# Altium PCB smartmcu.PcbDoc
Units mm, origin at the board's own origin, x right, y up, seen from the top; angles counter-clockwise.
Board outline 54.07 x 48 mm, 4 copper layers (Top Layer, Ground, Power 3v3, Bottom Layer), stack 0.603 mm thick; 89 components, 43 nets, 257 pads, 85 vias.
Unrouted connection lines stored in the file: 1.
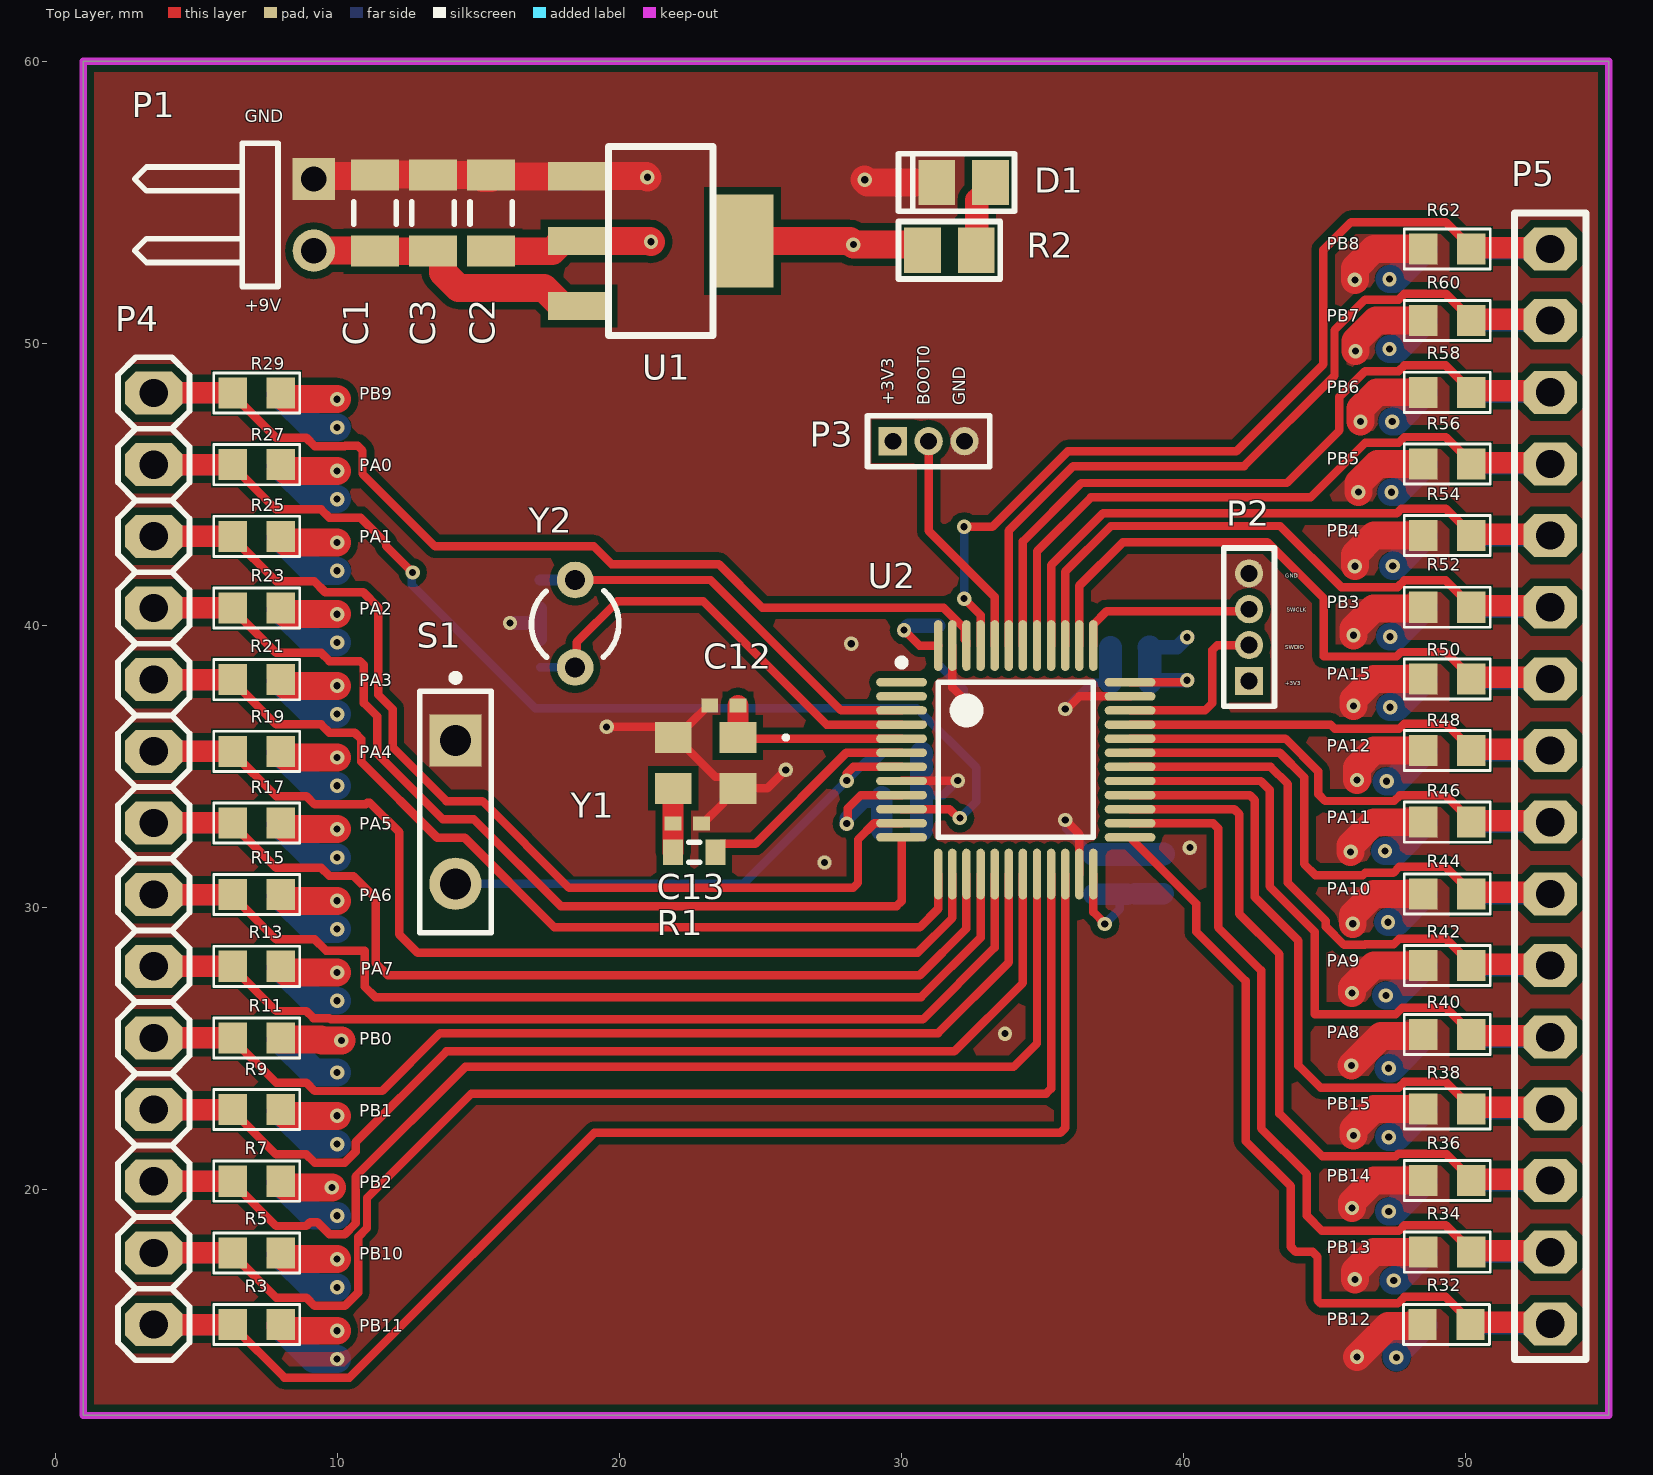
[diagram p0: Top Layer view]
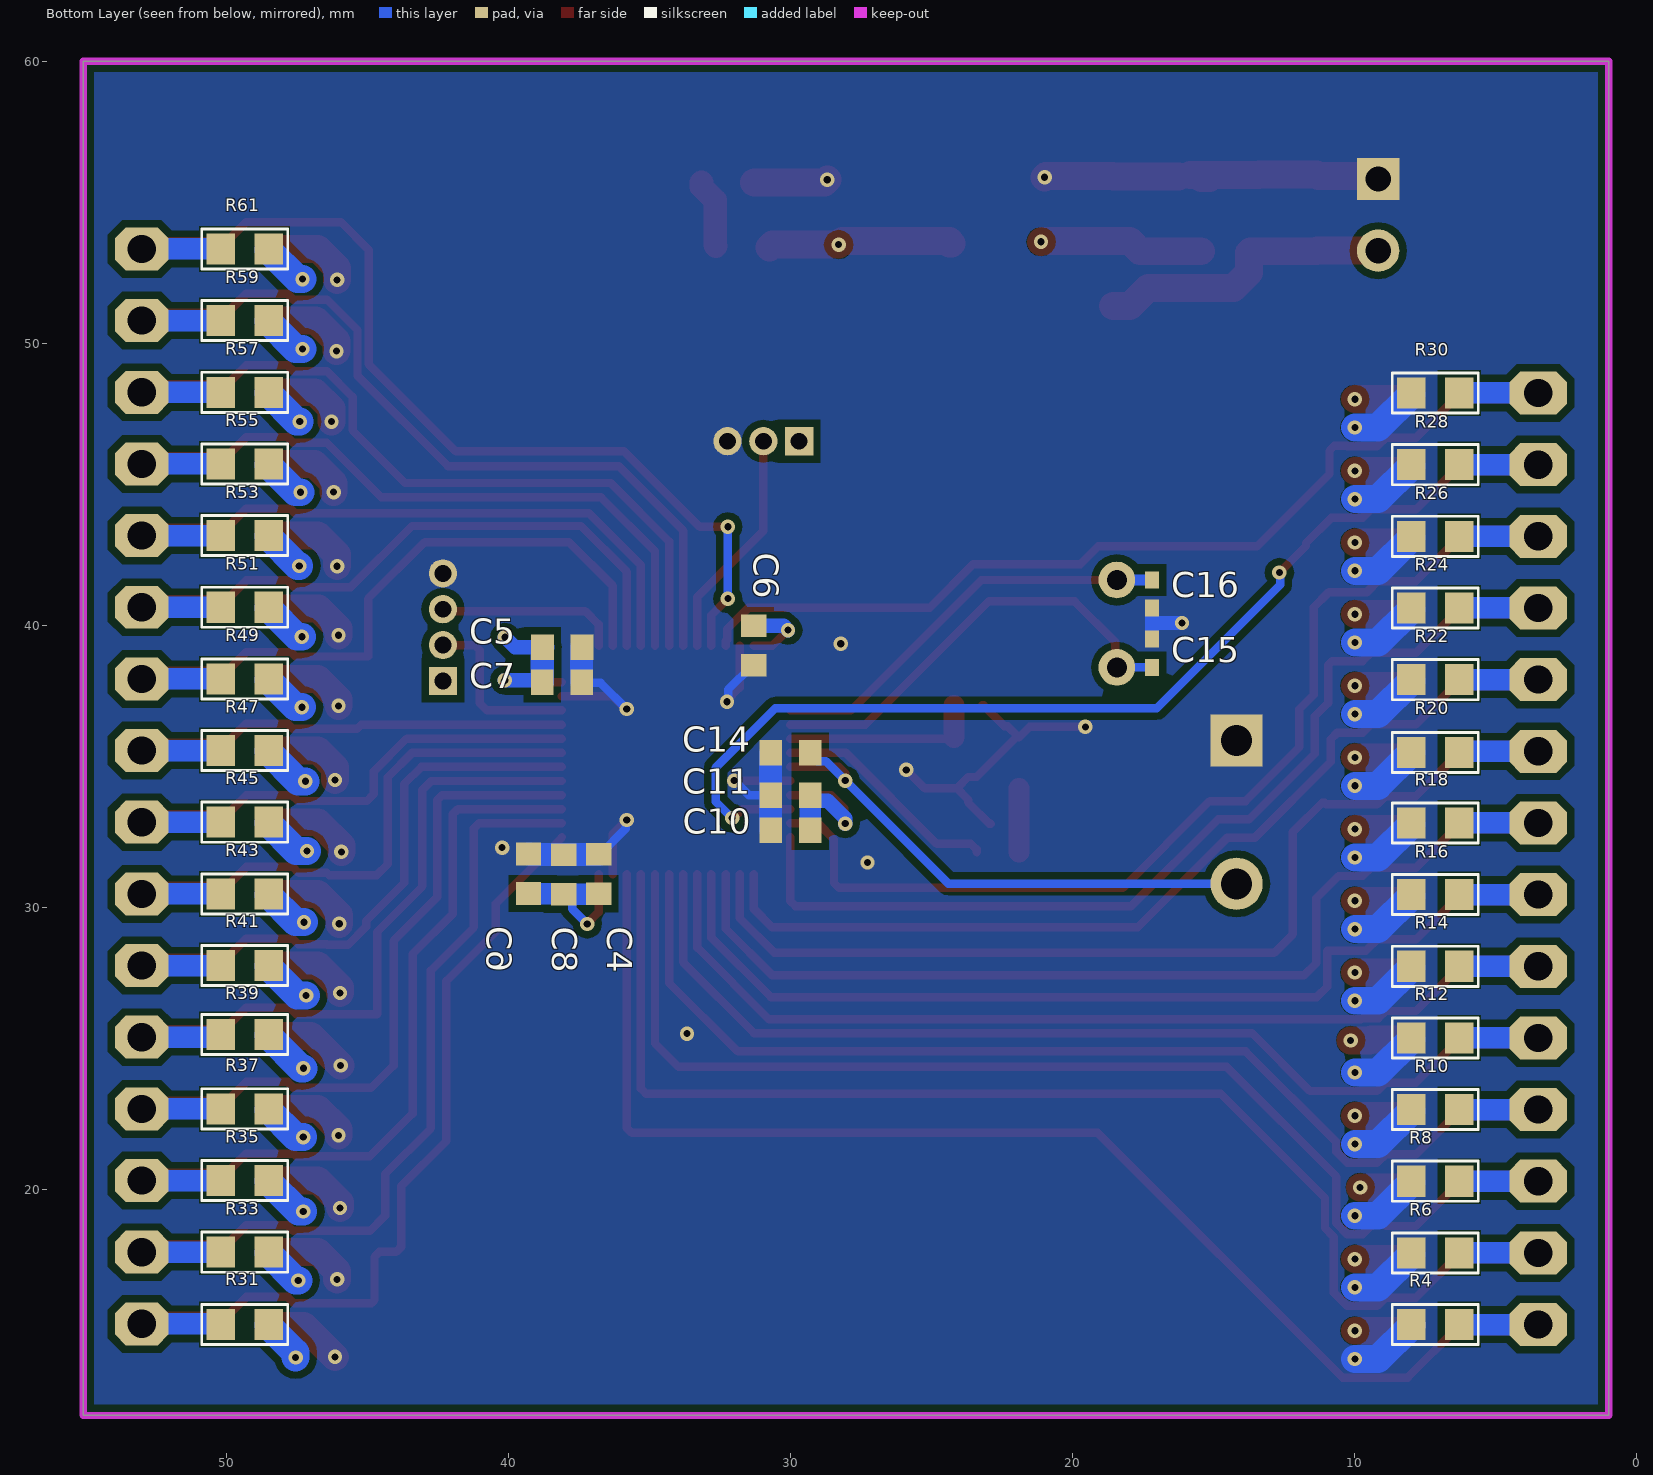
[diagram p1: Bottom Layer view, seen from below]
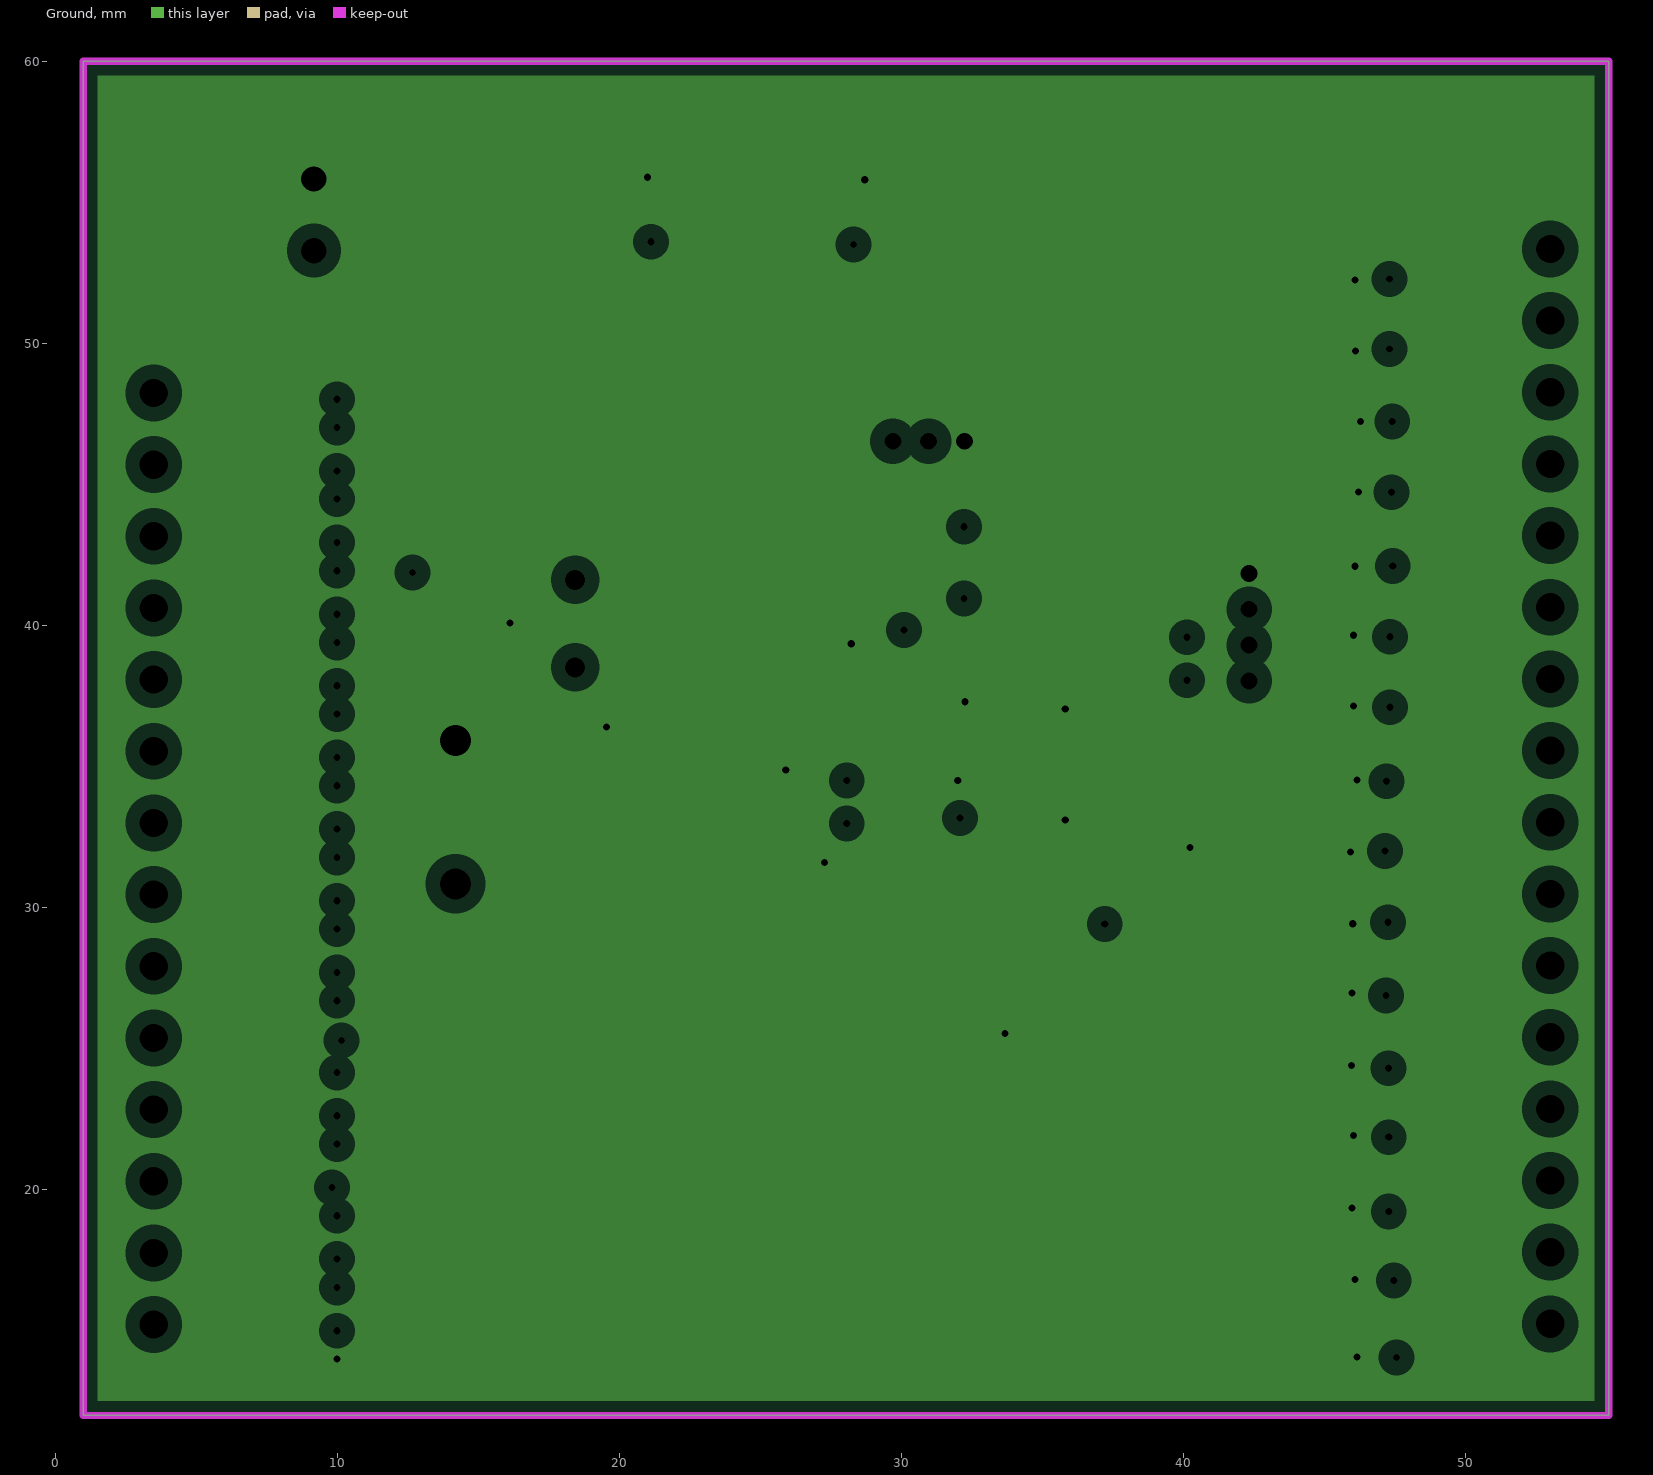
[diagram p2: Ground, clearances drawn from the general rule]
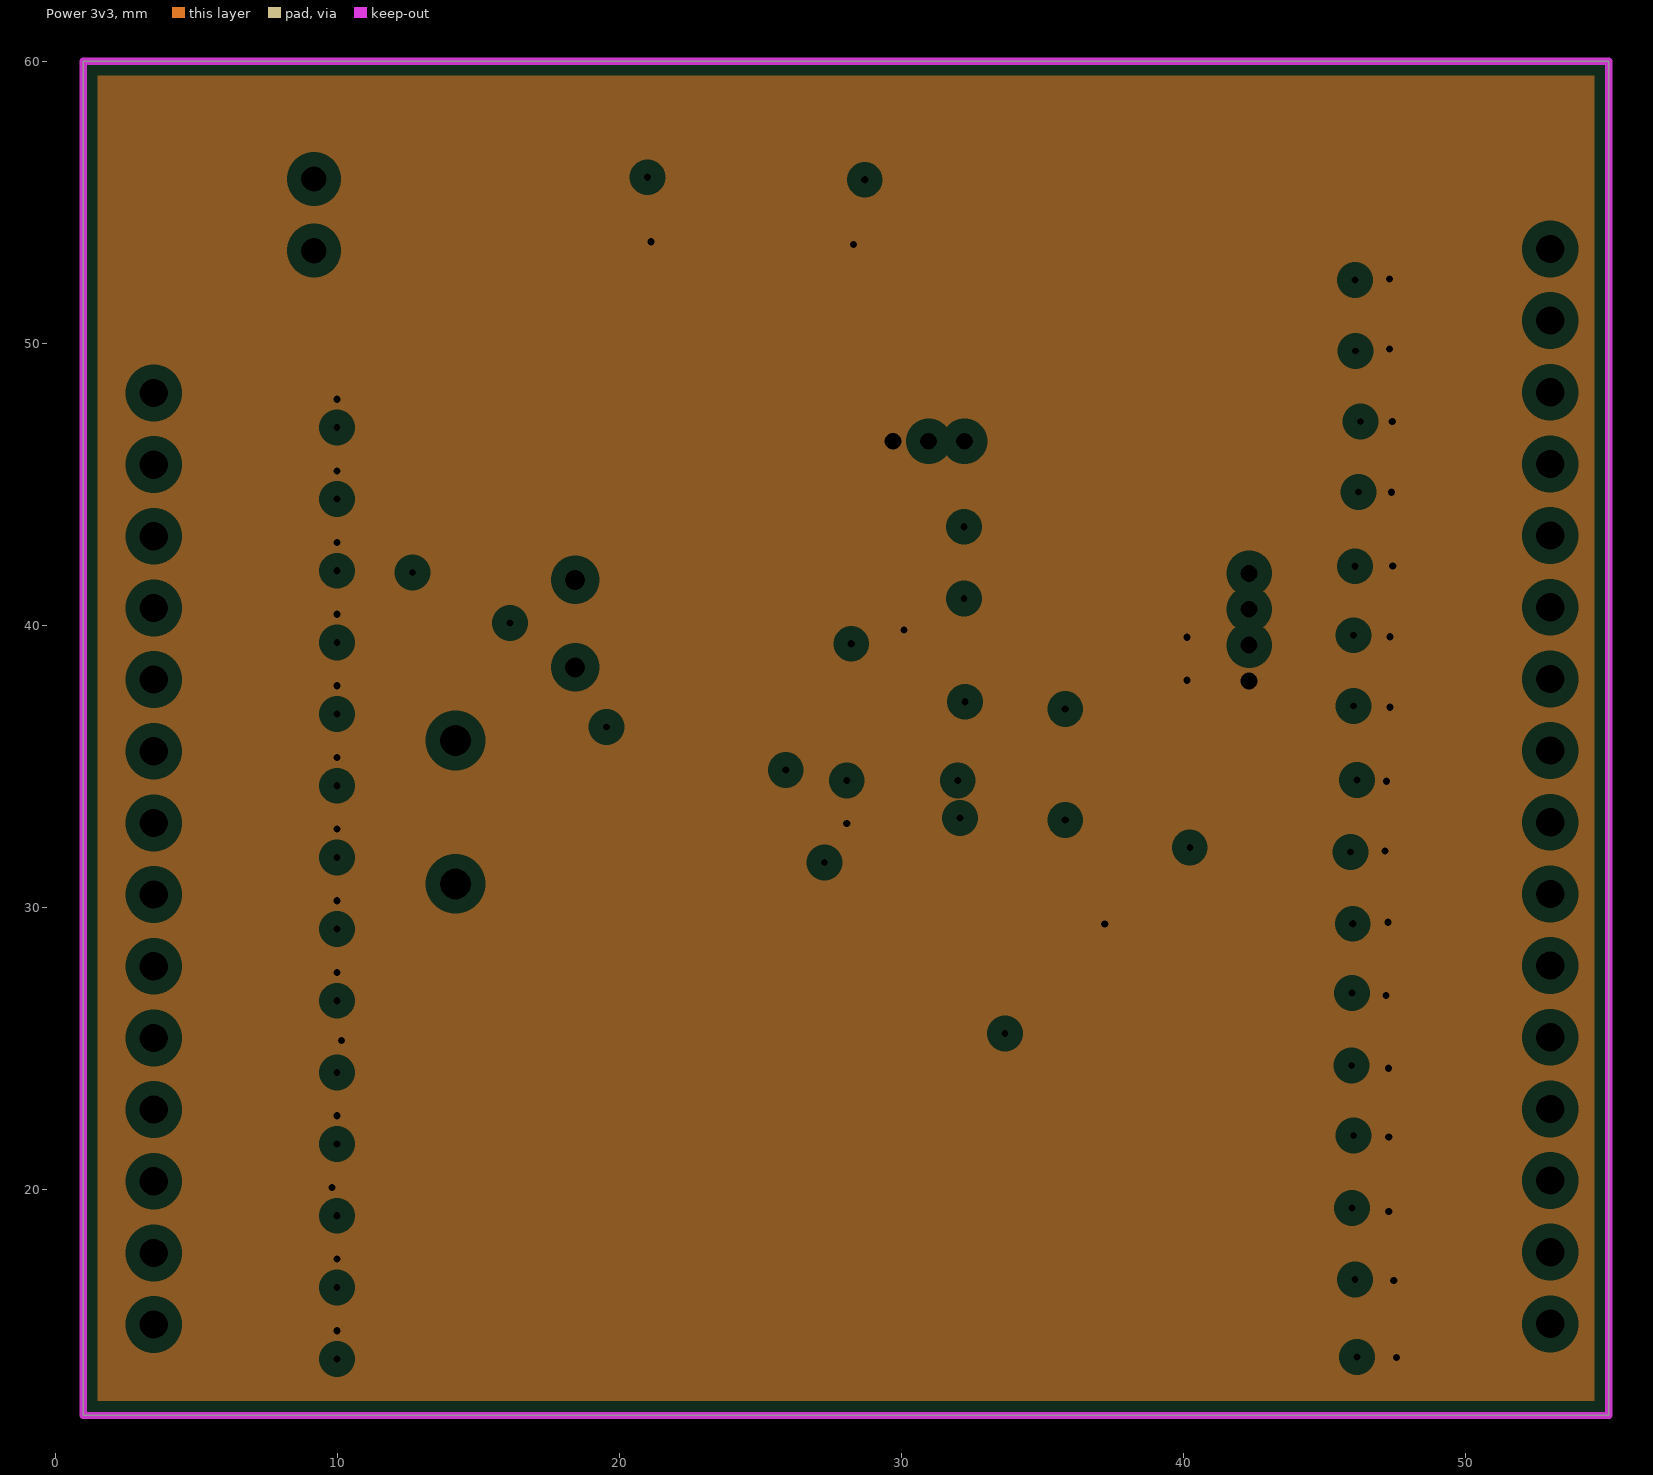
[diagram p3: Power 3v3, clearances drawn from the general rule]
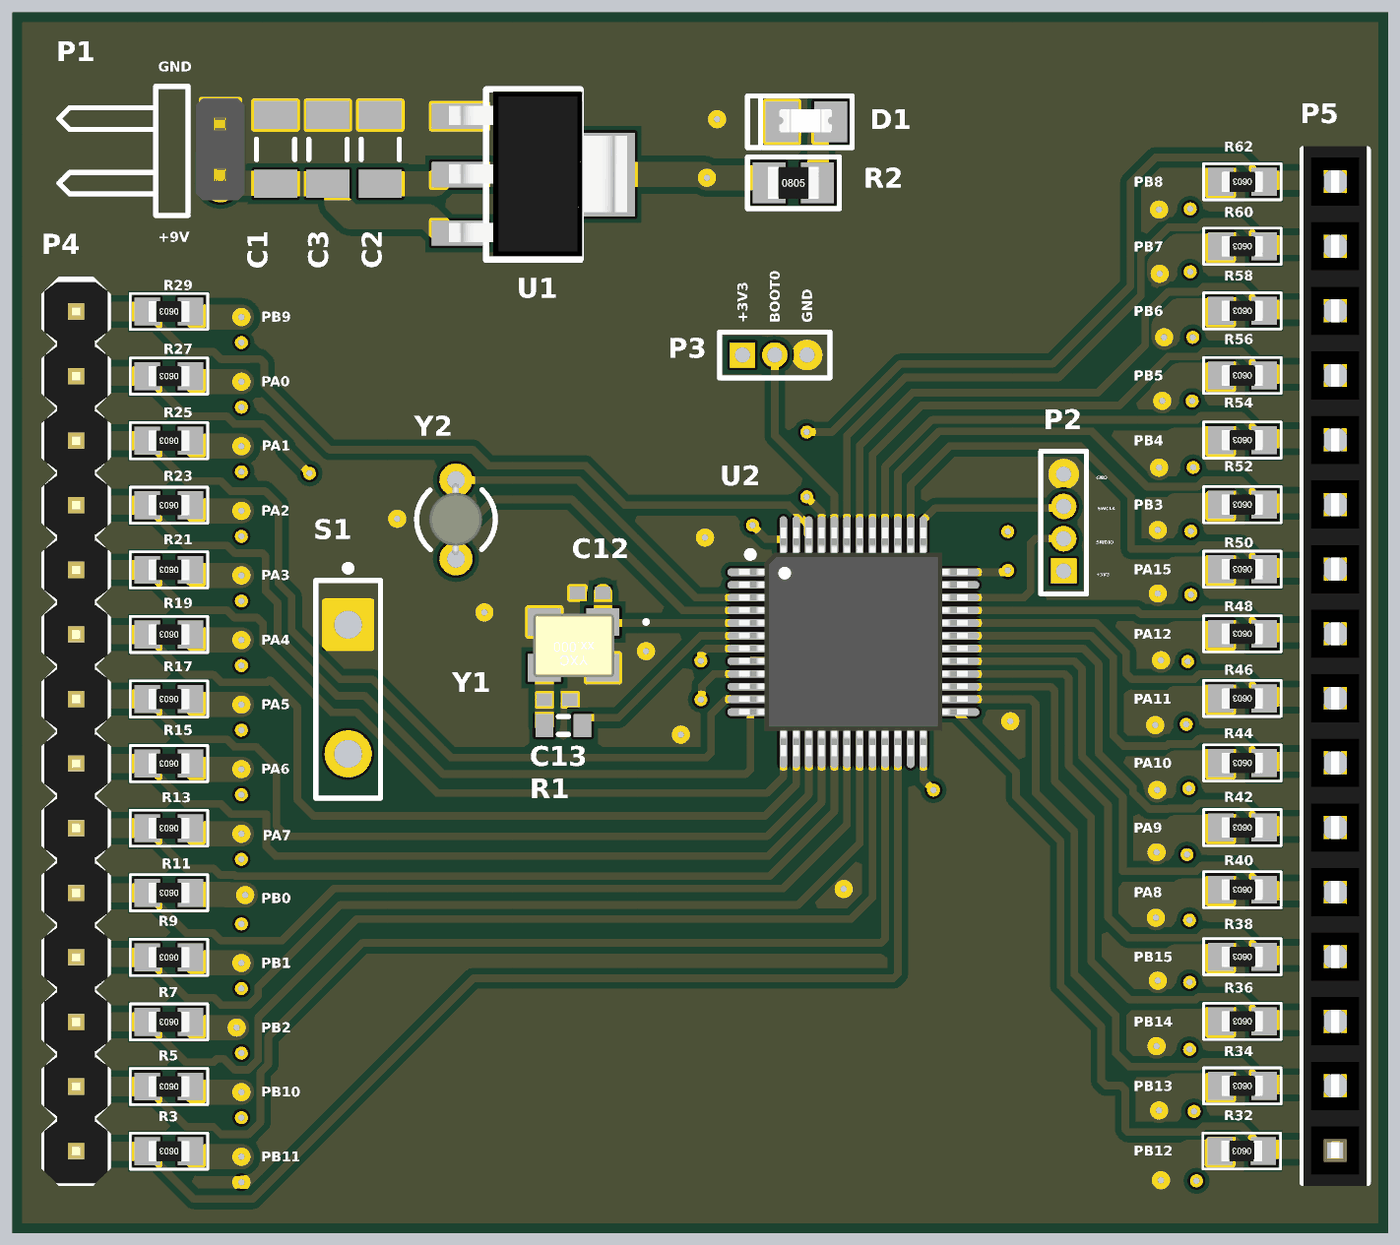
[diagram p4: 3D render of the assembled board from above, using the file's embedded part models]
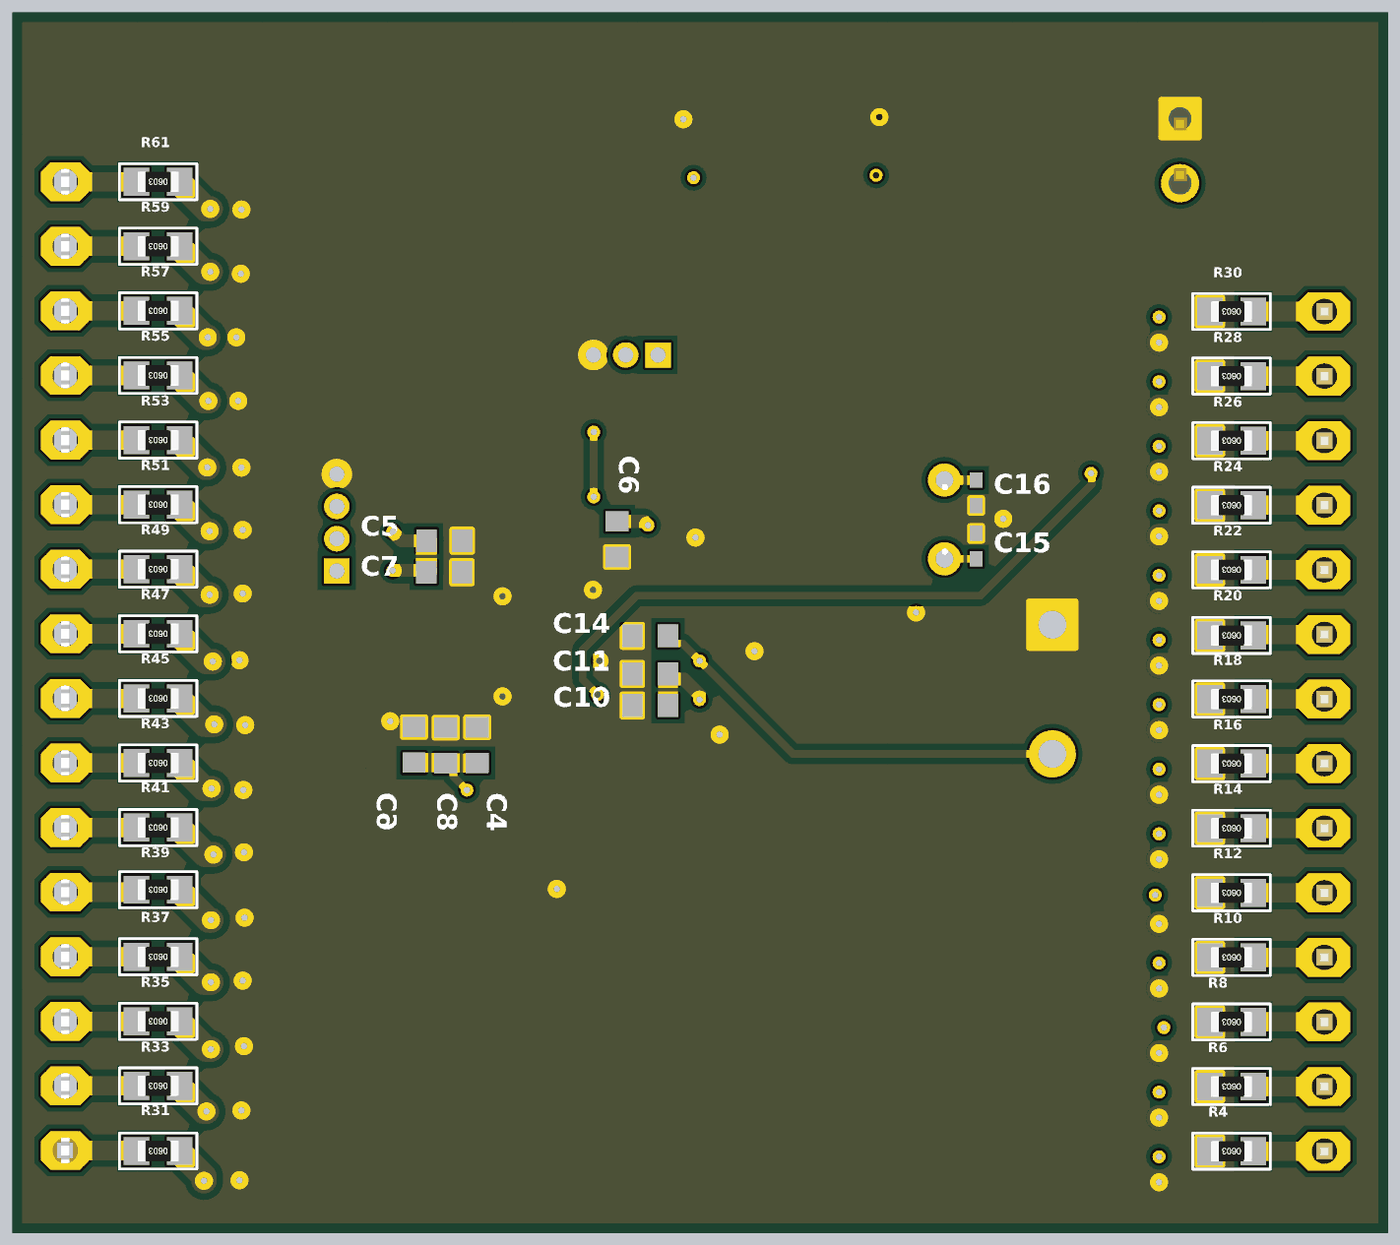
[diagram p5: 3D render of the assembled board from below, using the file's embedded part models]

## Layer stack, top to bottom
Top Solder: solder mask 0.0102, Solder Resist, Dk 3.5
Top Layer: signal copper 0.0356
Dielectric 2: prepreg 0.0711, PP-006, Dk 4.1
Ground: plane copper 0.035, net GND
Dielectric 1: dielectric 0.32, FR-4, Dk 4.8
Power 3v3: plane copper 0.035, net +3V3
Dielectric 3: prepreg 0.0711, PP-006, Dk 4.1
Bottom Layer: signal copper 0.0356
Bottom Solder: solder mask 0.0102, Solder Resist, Dk 3.5

## Board outline
1,12 1,60 55.075,60 55.075,12

## Design rules (kind name [scope] priority, off if disabled: settings)
Clearance [All] p1: gap=0.254 ignorepadtopadclearanceinfootprint=FALSE except(0.102: Arc-Arc Arc-Track Track-Track)
PlaneClearance [All] p1: clearance=0.508
PlaneConnect [All] p1: planeconnectstyle=Direct reliefexpansion=0.508 reliefentries=4 reliefconductorwidth=0.254 reliefairgap=0.254
PolygonConnect [All] p1: connectstyle=Direct reliefconductorwidth=0.254 reliefentries=4 polygonreliefangle="90 Angle" airgapwidth=0.254
RoutingVias [All] p1: holewidth=0.254 width=0.508 viastyle="Through Hole" minholewidth=0.254 minwidth=0.508 maxholewidth=0.711 maxwidth=1.27
SolderMaskExpansion [All] p1: expansion=0.102 istentingtop=FALSE
SupplyNets "Schematic Supply Nets_2" [InNet('GND')] p1: voltage=0.000
SupplyNets "Schematic Supply Nets_1" [InNet('+9V')] p2: voltage=0.000
SupplyNets "Schematic Supply Nets" [InNet('+3V3')] p3: voltage=0.000
UnRoutedNet [All] p1: checkbadconnections=TRUE
Width [All] p1: maxlimit=10 minlimit=0.254 preferedwidth=0.254
27 further rules are at their usual default settings.

## Classes and differential pairs
component class "Power Supply": C1 C2 C3 D1 P1 R2 U1
component class MCU: C4 C5 C6 C7 C8 C9 C10 C11 C12 C13 C14 C15 C16 P2 P3 P4 P5 R1 R3 R4 R5 R6 R7 R8 R9 R10 R11 R12 R13 R14 R15 R16 R17 R18 R19 R20 R21 R22 R23 R24 R25 R26 R27 R28 R29 R30 R31 R32 R33 R34 R35 R36 R37 R38 R39 R40 R41 R42 R43 R44 R45 R46 R47 R48 R49 R50 R51 R52 R53 R54 R55 R56 R57 R58 R59 R60 R61 R62 S1 U2 Y1 Y2

## Components (designator, comment, footprint, x,y, rotation, side; value= is the part's Value field where it differs from the comment)
C1 "Cap Semi Tantalium" C1206 11.344,54.615 r270 top value=100nF
C2 "Cap Semi Tantalium" C1206 15.459,54.615 r270 top value=100nF
C3 "Cap Semi Tantalium" C1206 13.401,54.615 r270 top value=10nF
C4 "Cap Semi" 1608[0603] 36.807,31.187 r270 bottom value=100nF
C5 "Cap Semi" 1608[0603] 38.096,39.224 r0 bottom value=100nF
C6 "Cap Semi" 1608[0603] 31.307,39.287 r90 bottom value=100nF
C7 "Cap Semi" 1608[0603] 38.107,37.987 r0 bottom value=100nf
C8 "Cap Semi" 1608[0603] 38.045,31.173 r270 bottom value=100nF
C9 "Cap Semi" 1608[0603] 39.29,31.198 r270 bottom value=4.7uF
C10 "Cap Semi" 1608[0603] 30.007,32.747 r180 bottom value=10nF
C11 "Cap Semi" 1608[0603] 30.007,33.987 r180 bottom value=1uF
C12 "Cap Semi" 0402 23.709,37.167 r0 top value=10pF
C13 "Cap Semi" 0402 22.409,32.976 r180 top value=10pF
C14 "Cap Semi" 1608[0603] 30.007,35.487 r180 bottom value=100nf
C15 "Cap Semi" 0402 17.192,39.013 r270 bottom value=10pF
C16 "Cap Semi" 0402 17.192,41.113 r90 bottom value=10pF
D1 "LED" MY_LED_0805 32.208,55.776 r0 top
P1 "" HDR1X2H 9.174,55.827 r270 top
P2 "MHDR1X4" MHDR1X4 42.325,38.035 r90 top
P3 "MHDR1X3" MHDR1X3 29.698,46.53 r0 top
P4 "Header 14" My_1X14 3.5,31.73 r90 top
P5 "Header 16" MY_FE16 53,34.295 r90 top
R1 "Res3" J1-0603 22.659,31.96 r0 top value=10Ω
R2 "1K" MY_0805 31.7,53.3 r0 top
R3 "1K" MY_0603 7.15,15.22 r180 top
R4 "1K" MY_0603 7.15,15.22 r0 bottom
R5 "1K" MY_0603 7.15,17.76 r180 top
R6 "1K" MY_0603 7.15,17.76 r0 bottom
R7 "1K" MY_0603 7.15,20.3 r180 top
R8 "1K" MY_0603 7.15,20.3 r0 bottom
R9 "1K" MY_0603 7.15,22.84 r180 top
R10 "1K" MY_0603 7.15,22.84 r0 bottom
R11 "1K" MY_0603 7.15,25.38 r180 top
R12 "1K" MY_0603 7.15,25.38 r0 bottom
R13 "1K" MY_0603 7.15,27.92 r180 top
R14 "1K" MY_0603 7.15,27.92 r0 bottom
R15 "1K" MY_0603 7.15,30.46 r180 top
R16 "1K" MY_0603 7.15,30.46 r0 bottom
R17 "1K" MY_0603 7.15,33 r180 top
R18 "1K" MY_0603 7.15,33 r0 bottom
R19 "1K" MY_0603 7.15,35.54 r180 top
R20 "1K" MY_0603 7.15,35.5 r0 bottom
R21 "1K" MY_0603 7.15,38.08 r180 top
R22 "1K" MY_0603 7.15,38.08 r0 bottom
R23 "1K" MY_0603 7.15,40.62 r180 top
R24 "1K" MY_0603 7.15,40.62 r0 bottom
R25 "1K" MY_0603 7.15,43.16 r180 top
R26 "1K" MY_0603 7.15,43.16 r0 bottom
R27 "1K" MY_0603 7.15,45.7 r180 top
R28 "1K" MY_0603 7.15,45.7 r0 bottom
R29 "=value" MY_0603 7.15,48.24 r180 top
R30 "=value" MY_0603 7.15,48.24 r0 bottom
R31 "1K" MY_0603 49.35,15.225 r0 bottom
R32 "1K" MY_0603 49.325,15.225 r180 top
R33 "1K" MY_0603 49.35,17.785 r0 bottom
R34 "1K" MY_0603 49.35,17.785 r180 top
R35 "1K" MY_0603 49.35,20.325 r0 bottom
R36 "1K" MY_0603 49.35,20.325 r180 top
R37 "1K" MY_0603 49.35,22.865 r0 bottom
R38 "1K" MY_0603 49.35,22.865 r180 top
R39 "1K" MY_0603 49.35,25.5 r0 bottom
R40 "1K" MY_0603 49.35,25.5 r180 top
R41 "1K" MY_0603 49.35,27.945 r0 bottom
R42 "1K" MY_0603 49.35,27.945 r180 top
R43 "1K" MY_0603 49.35,30.485 r0 bottom
R44 "1K" MY_0603 49.35,30.485 r180 top
R45 "1K" MY_0603 49.35,33.025 r0 bottom
R46 "1K" MY_0603 49.35,33.025 r180 top
R47 "1K" MY_0603 49.35,35.565 r0 bottom
R48 "1K" MY_0603 49.35,35.565 r180 top
R49 "1K" MY_0603 49.35,38.105 r0 bottom
R50 "1K" MY_0603 49.35,38.105 r180 top
R51 "1K" MY_0603 49.35,40.645 r0 bottom
R52 "1K" MY_0603 49.35,40.645 r180 top
R53 "1K" MY_0603 49.35,43.185 r0 bottom
R54 "1K" MY_0603 49.35,43.185 r180 top
R55 "1K" MY_0603 49.35,45.725 r0 bottom
R56 "1K" MY_0603 49.35,45.725 r180 top
R57 "1K" MY_0603 49.35,48.265 r0 bottom
R58 "1K" MY_0603 49.35,48.265 r180 top
R59 "1K" MY_0603 49.35,50.805 r0 bottom
R60 "1K" MY_0603 49.35,50.805 r180 top
R61 "1K" MY_0603 49.35,53.345 r0 bottom
R62 "1K" MY_0603 49.35,53.345 r180 top
S1 "SW-PB" SPST-2 14.195,33.382 r270 top
U1 "LM1117 800-mA, Low-Dropout Linear Regulator" "4-PIN SOT" 19.624,53.624 r270 top
U2 "" LQFP48_N 34.057,35.237 r0 top
Y1 "" ECS801233JGNTR 23.059,35.128 r180 top value=8MHz
Y2 "" R38 18.436,40.063 r0 top value=32kHz

## Footprints (in the part's own frame and the unit in brackets; to place one, negate y for a bottom-side part, rotate by r counter-clockwise, add the part's x,y. Pads: shape width x height; smd on the part's side, far side on the other; paste and mask are expansions set on the pad)
"4-PIN SOT" [mm]
  rect 1x2.2 smd: 0(2.3,-1.05) 1(-2.3,-1.05) 2(0,-1.05)
  rect 3.3x2.2 smd: 2(0,4.75)
  silkscreen extent -3.35,0 3.35,3.7, body extent -3.27,-1.47 3.23,5.53, height 1.68
0402 [mm]
  rect 0.6x0.5 smd: 1(-0.5,0) 2(0.5,0)
  body extent -0.55,-0.3 0.55,0.3, height 1.3
1608[0603] [mm]
  rect 0.8x0.9 smd: 1(-0.7,0) 2(0.7,0)
  body extent -0.87,-0.48 0.87,0.48, height 1.3
C1206 [mm]
  rect 1.1x1.7 smd: 1(-1.35,0) 2(1.35,0)
  silkscreen extent -0.4,-0.75 0.4,0.75, body extent -1.7,-0.9 1.7,0.9, height 1.3
ECS801233JGNTR [mm]
  rect 1.3x1.1 smd: 1(-1.15,-0.9) 2(1.15,-0.9) 3(1.15,0.9) 4(-1.15,0.9)
  silkscreen extent -2.9,-0.95 -2.8,-0.85, body extent -1.6,-1.23 1.58,1.27, height 0.69
HDR1X2H [mm]
  rect 1.5x1.5 hole 0.9: 1(0,0)
  round 1.5 hole 0.9: 2(2.54,0)
  silkscreen extent -1.27,-6.35 3.81,-1.27, body extent -0.79,-1.01 3.21,0.99, height 6.05
J1-0603 [mm]
  rect 0.7x0.9 smd: 1(-0.75,0) 2(0.75,0)
  silkscreen extent -0.2,-0.35 0.2,0.35, body extent -0.85,-0.48 0.85,0.48, height 0.9
LQFP48_N [mm]
  oval 1.8x0.3 smd: 1(-4.05,2.75) 2(-4.05,2.25) 3(-4.05,1.75) 4(-4.05,1.25) 5(-4.05,0.75) 6(-4.05,0.25) 7(-4.05,-0.25) 8(-4.05,-0.75) 9(-4.05,-1.25) 10(-4.05,-1.75) 11(-4.05,-2.25) 12(-4.05,-2.75) 25(4.05,-2.75) 26(4.05,-2.25) 27(4.05,-1.75) 28(4.05,-1.25) 29(4.05,-0.75) 30(4.05,-0.25) 31(4.05,0.25) 32(4.05,0.75) 33(4.05,1.25) 34(4.05,1.75) 35(4.05,2.25) 36(4.05,2.75)
  oval 0.3x1.8 smd: 13(-2.75,-4.05) 14(-2.25,-4.05) 15(-1.75,-4.05) 16(-1.25,-4.05) 17(-0.75,-4.05) 18(-0.25,-4.05) 19(0.25,-4.05) 20(0.75,-4.05) 21(1.25,-4.05) 22(1.75,-4.05) 23(2.25,-4.05) 24(2.75,-4.05) 37(2.75,4.05) 38(2.25,4.05) 39(1.75,4.05) 40(1.25,4.05) 41(0.75,4.05) 42(0.25,4.05) 43(-0.25,4.05) 44(-0.75,4.05) 45(-1.25,4.05) 46(-1.75,4.05) 47(-2.25,4.05) 48(-2.75,4.05)
  silkscreen extent -4.17,-2.75 2.75,3.57, body extent -4.5,-4.49 4.5,4.51, height 1.56
MHDR1X3 [mm]
  rect 1x1 hole 0.6: 1(0,0)
  round 1 hole 0.6: 2(1.27,0) 3(2.54,0)
  silkscreen extent -0.9,-0.9 3.44,0.9
MHDR1X4 [mm]
  rect 1x1 hole 0.6: 1(0,0)
  round 1 hole 0.6: 2(1.27,0) 3(2.54,0) 4(3.81,0)
  silkscreen extent -0.9,-0.9 4.71,0.9
My_1X14 [mil]
  oct 60x80 hole 39.37: 1(-650,0) 2(-550,0) 3(-450,0) 4(-350,0) 5(-250,0) 6(-150,0) 7(-50,0) 8(50,0) 9(150,0) 10(250,0) 11(350,0) 12(450,0) 13(550,0) 14(650,0)
  silkscreen extent -700,-50 700,50, body extent -700,-49 696,49, height 323
MY_0603 [mm]
  rect 1x1.1 smd: 1(-0.85,0) 2(0.85,0)
  silkscreen extent -1.52,-0.71 1.52,0.71, body extent -0.8,-0.4 0.8,0.4, height 0.44
MY_0805 [mm]
  rect 1.3x1.6 smd: 1(-0.95,0) 2(0.95,0)
  silkscreen extent -1.8,-1.02 1.8,1.02, body extent -1,-0.62 1,0.63, height 0.59
MY_FE16 [mm]
  oct 1.524x1.905 hole 1: 1(-19.05,0) 2(-16.51,0) 3(-13.97,0) 4(-11.43,0) 5(-8.89,0) 6(-6.35,0) 7(-3.81,0) 8(-1.27,0) 9(1.27,0) 10(3.81,0) 11(6.35,0) 12(8.89,0) 13(11.43,0) 14(13.97,0) 15(16.51,0) 16(19.05,0)
  silkscreen extent -20.32,-1.27 20.32,1.27, body extent -20.44,-1.25 20.45,1.25, height 8.5
MY_LED_0805 [mm]
  rect 1.3x1.6 smd: A(0.95,-0.076) K(-0.95,-0.076)
  silkscreen extent -2.31,-1.09 1.8,0.94, body extent -1.06,-0.48 1.01,0.42, height 0.86
R38 [mm]
  round 1.3 hole 0.7: 1(0,1.55) 2(0,-1.55)
  silkscreen extent -1.55,-1.19 1.55,1.17, body extent -1.06,-1.4 1.03,1.4, height 8.2
SPST-2 [mm]
  rect 1.85x1.85 hole 1.1: 1(-2.54,0)
  round 1.85 hole 1.1: 2(2.54,0)
  silkscreen extent -4.89,-1.27 4.28,1.27

## Part data
C1 C2 C3: library part "Cap Semi", "Capacitor (Semiconductor SIM Model)", LatestRevisionDate=29-May-2009, LatestRevisionNote="IPC-7351 Footprint Added.", PackageDescription="Chip Capacitor", PackageReference=C1206, Published=8-Jun-2000, Publisher="Altium Limited"
C4 C5 C6 C7 C8 C9 C10 C11 C12 C13 C14 C15 C16: "Capacitor (Semiconductor SIM Model)", LatestRevisionDate=29-May-2009, LatestRevisionNote="IPC-7351 Footprint Added.", PackageDescription="Chip Capacitor", PackageReference=C1206, Published=8-Jun-2000, Publisher="Altium Limited"
D1: "Typical INFRARED GaAs LED", ASiD Part Number=LED-AS
P1: library part "Header 2H", "Header, 2-Pin, Right Angle", Voltage=9V, LatestRevisionDate=17-Jul-2002, LatestRevisionNote="Re-released for DXP Platform.", Publisher="Altium Limited"
P2: "Header, 4-Pin", LatestRevisionDate=17-Jul-2002, LatestRevisionNote="Re-released for DXP Platform.", Publisher="Altium Limited"
P3: "Header, 3-Pin", LatestRevisionDate=17-Jul-2002, LatestRevisionNote="Re-released for DXP Platform.", Publisher="Altium Limited"
P4: "Header, 14-Pin", ASiD Part Number="Header 14-AS"
P5: "Header, 16-Pin", ASiD Part Number="Header 16-AS"
R1: "Resistor", LatestRevisionDate=29-May-2009, LatestRevisionNote="IPC-7351 Footprint Added.", PackageDescription="Chip Resistor", PackageReference=J1-0603, Published=8-Jun-2000, Publisher="Altium Limited"
R2 R3 R4 R5 R6 R7 R8 R9 R10 R11 R12 R13 R14 R15 R16 R17 R18 R19 R20 R21 R22 R23 R24 R25 R26 R27 R28 R29 R30 R31 R32 R33 R34 R35 R36 R37 R38 R39 R40 R41 R42 R43 R44 R45 R46 R47 R48 R49 R50 R51 R52 R53 R54 R55 R56 R57 R58 R59 R60 R61 R62: library part Res, "Standard resistor", ASiD Part Number=Res-AS
S1: "Switch", LatestRevisionDate=17-Jul-2002, LatestRevisionNote="Re-released for DXP Platform.", PackageDescription="Switch; 2 Leads", PackageReference=SPST-2, Published=24-Mar-1999, Publisher="Altium Limited"
U1: library part LM1117, "The LM1117 is a low dropout voltage regulator with a  / dropout of 1.2 V at 800 mA of load current. / The LM1117 is available in an adjustable version,  / which can set the output voltage from 1.25 V to 13.8 V  / with only two external resistors. In addition, the device  / is available in five fixed voltages, 1.8 V, 2.5 V, 3.3 V,  / and 5 V. / The LM1117 offers current limiting and thermal  / shutdown. The circuit includes a Zener trimmed bandgap reference to assure output voltage accuracy to  / within ±1%. / A minimum of 10-µF tantalum capacitor is required  / at the output to improve the transient response and  / stability", Output Voltage=3.3V, Package="4-Pin SOT (DCY Package)", ComponentLink1Description=Datasheet, ComponentLink1URL=https://www.ti.com/lit/ds/symlink/lm1117.pdf
U2: library part STM32F103C8T6, "STM32 ARM-based 32-bit MCU with 64 Kbytes Flash, 48-pin LQFP, Industrial Temperature", ComponentLink1Description="Manufacturer Link", ComponentLink1URL=www.st.com/stm32, ComponentLink2Description=Datasheet, ComponentLink2URL=http://www.st.com/stonline/products/literature/ds/13587.pdf, DatasheetVersion="rev6, Mar-2008", PackageDescription="48-Pin Low-Profile Quad Flat Pack, 7 x 7 mm Body, 0.5 mm Pitch (LQFP48)", PackageReference=LQFP48, PackageVersion=Mar-2008, Published=30-May-2008, Publisher="Altium Limited"
Y1: library part ECS-80-12-33-JGN-TR, "Crystal or Oscillator", Manufacturer_Name=ECS, Mouser Part Number=520-80-12-33-JGN-TR, Arrow Part Number=ECS-80-12-33-JGN-TR, Arrow Price/Stock=https://www.arrow.com/en/products/ecs-80-12-33-jgn-tr/ecs-international?region=europe, Datasheet Link=https://ecsxtal.com/store/pdf/ecx-32.pdf, Height=0.8mm, Manufacturer_Part_Number=ECS-80-12-33-JGN-TR, Mouser Price/Stock=https://www.mouser.co.uk/ProductDetail/ECS/ECS-80-12-33-JGN-TR?qs=d0WKAl%252BL4KaVcQK0q%252BTt4Q%3D%3D
Y2: library part XTAL, "Crystal Oscillator", LatestRevisionDate=17-Jul-2002, LatestRevisionNote="Re-released for DXP Platform.", PackageDescription="Crystal, Thru-Hole; 2 Leads; Body 3.1 x 8.2 mm (Dia.xH)", PackageReference=R38, Published=8-Jun-2000, Publisher="Altium Limited"

## Via types
v1: diameter 0.508, hole 0.254, Top Layer to Bottom Layer, 85 vias

## Nets (pads, with @x,y where several pads share a name; then routed paths per layer and width w, separated by ;. In a path a pad name is that pad's centre, name@x,y a point inside that pad or via, vN(x,y) a via of type N, cw(c..) or ccw(c..) an arc to the next point about the centre after c; other vN are vias at no path point)
32IN: C16.2 U2.3 Y2.1 | length 14.7
  Top Layer w0.3: Y2.1@18.437,41.612 23.237,41.612 27.862,36.987 U2.3
  Bottom Layer w0.381: C16.2 Y2.1
32OUT: C15.2 U2.4 Y2.2 | length 16.1
  Top Layer w0.3: Y2.2@18.436,38.513 18.495,38.571 18.495,39.41 19.935,40.85 22.983,40.85 27.346,36.487 U2.4
  Bottom Layer w0.3: C15.2 Y2.2@18.436,38.513
+3V3: C2.2 C4.2 C5.2 C6.2 C7.2 C8.2 C9.2 C10.2 C11.2 P2.1 P3.1 R2.1 R3.1 R5.1 R7.1 R9.1 R11.1 R13.1 R15.1 R17.1 R19.1 R21.1 R23.1 R25.1 R27.1 R29.1 R31.1 R33.1 R35.1 R37.1 R39.1 R41.1 R43.1 R45.1 R47.1 R49.1 R51.1 R53.1 R55.1 R57.1 R59.1 R61.1 U1.2 U2.9 U2.24 U2.36 U2.48 | length 84.4
  Top Layer w0.3: v1(28.063,32.976) 28.103,33.016 28.103,33.524 28.566,33.987 U2.9 ; v1(30.095,39.834) 30.642,39.287 U2.48 ; U2.24 36.807,29.837 37.207,29.437 v1(37.207,29.42) ; U2.36@38.107,37.987 40.002,37.987 40.072,38.056 v1(40.128,38.056)
  Top Layer w0.991: R3.1 8,15.17 8.005,15.165 8.055,15.165 8.22,15 v1(10,15) ; R11.1@8.005,25.334 8.005,25.325 9.424,25.325 9.458,25.291 v1(10.15,25.291) ; R5.1@8.22,17.54 v1(10,17.54) ; R7.1@8.22,20.08 v1(9.813,20.08) ; R9.1@8.22,22.62 v1(10,22.62) ; R13.1@8.22,27.7 v1(10,27.7) ; R15.1@8.22,30.24 v1(10,30.24) ; R17.1@8.22,32.78 v1(10,32.78) ; R19.1@8.22,35.32 v1(10,35.32) ; R21.1@8.22,37.86 v1(10,37.86) ; R23.1@8.22,40.4 v1(10,40.4) ; R25.1@8.22,42.94 v1(10,42.94) ; R27.1@8.22,45.48 v1(10,45.48) ; R29.1@8.22,48.02 v1(10,48.02) ; C2.2 17.615,53.265 17.974,53.624 18.574,53.624 21.098,53.624 v1(21.123,53.599) ; U1.2@24.301,53.538 U1.2@24.374,53.538 ; U1.2@24.374,53.624 28.176,53.624 v1(28.3,53.5) 30.65,53.5 R2.1@30.75,53.4
  Bottom Layer w0.3: v1(37.207,29.42) 37.745,29.958 37.745,30.222 38.002,30.48 C8.2@38.038,30.48 ; C7.2 C7.2@38.877,38.056
  Bottom Layer w0.508: v1(28.063,32.976) 28.063,33.168 28.685,33.791 29.161,33.791 29.307,33.937 C11.2 ; v1(30.095,39.834) 30.248,39.987 C6.2 ; C4.2 C4.2@36.814,30.48 ; C8.2@38.038,30.48 C8.2 ; C5.2 39.772,39.224 v1(40.128,39.58) ; C7.2@38.877,38.056 v1(40.128,38.056)
  Bottom Layer w0.762: C10.2 C11.2@29.307,33.937 ; C4.2@36.814,30.48 C8.2@38.002,30.48 ; C8.2@38.285,30.498 C9.2
  Bottom Layer w0.838: C5.2 38.802,39.219 38.802,37.992 C7.2
  Bottom Layer w0.991: v1(47.144,32.006) 47.53,32.006 48.5,32.975 R45.1 ; v1(47.175,26.883) 47.487,26.883 48.5,27.895 R41.1 ; v1(47.2,34.475) 47.46,34.475 48.5,35.515 R47.1 ; v1(47.25,29.482) 47.547,29.482 48.5,30.435 R43.1 ; v1(47.272,24.303) 47.353,24.303 48.5,25.45 R39.1 ; v1(47.275,19.225) 47.45,19.225 48.5,20.275 R35.1 ; v1(47.275,21.862) 47.547,21.862 48.5,22.815 R37.1 ; v1(47.3,49.802) 47.547,49.802 48.5,50.755 R59.1 ; v1(47.3,52.275) 47.48,52.275 48.5,53.295 R61.1 ; v1(47.325,37.102) 47.547,37.102 48.5,38.055 R49.1 ; v1(47.325,39.6) 47.505,39.6 48.5,40.595 R51.1 ; v1(47.375,44.722) 47.547,44.722 48.5,45.675 R55.1 ; v1(47.4,47.225) 47.51,47.225 48.5,48.215 R57.1 ; v1(47.417,42.109) 47.474,42.109 48.5,43.135 R53.1 ; v1(47.45,16.782) 47.547,16.782 48.5,17.735 R33.1 ; v1(47.547,14.053) 47.547,14.222 48.5,15.175 R31.1
+9V: C1.2 C3.2 P1.2 U1.0 | length 10.4
  Top Layer w0.991: P1.2@9.453,53.308 9.474,53.287 11.322,53.287 C1.2 C3.2 13.701,53.265 13.756,53.21 13.756,52.508 14.298,51.966 17.333,51.966 17.974,51.324 U1.0
BOOT: P3.2 U2.44 | length 8.2
  Top Layer w0.3: P3.2 30.968,43.357 33.307,41.018 U2.44
GND: C1.1 C2.1 C3.1 C4.1 C5.1 C6.1 C7.1 C8.1 C9.1 C10.1 C11.1 C12.1 C13.1 C14.1 C15.1 C16.1 D1.K P1.1 P2.4 P3.3 R4.2 R6.2 R8.2 R10.2 R12.2 R14.2 R16.2 R18.2 R20.2 R22.2 R24.2 R26.2 R28.2 R30.2 R32.2 R34.2 R36.2 R38.2 R40.2 R42.2 R44.2 R46.2 R48.2 R50.2 R52.2 R54.2 R56.2 R58.2 R60.2 R62.2 S1.1 U1.1 U2.8 U2.23 U2.35 U2.47 Y1.2 Y1.4 | length 132.8
  Top Layer w0.3: v1(19.554,36.405) 21.533,36.405 Y1.2 ; C13.1 22.959,32.976 23.709,33.726 23.709,33.828 24.109,34.228 23.709,34.629 23.409,34.629 22.009,36.029 Y1.2 ; C12.1 23.159,37.167 22.421,36.429 22.309,36.429 Y1.2 ; Y1.4 25.251,34.228 v1(25.904,34.881) ; U2.8@30.007,34.487 30.021,34.5 v1(32,34.5) ; U2.47@31.807,39.287 31.807,37.797 32.254,37.35 v1(32.254,37.294) ; v1(35.81,33.103) 36.307,32.605 U2.23 ; v1(35.81,37.04) 35.866,37.04 36.313,37.487 U2.35
  Top Layer w0.991: P1.1@9.453,55.848 9.54,55.936 11.289,55.936 11.344,55.99 11.357,55.978 13.389,55.978 C3.1 C2.1 C2.1@15.845,55.965 ; C2.1@15.083,55.94 15.159,55.863 15.459,55.863 C2.1@15.49,55.894 ; C2.1@16.252,55.92 18.57,55.92 U1.1 20.957,55.924 v1(20.996,55.885) ; v1(28.7,55.8) 28.8,55.7 D1.K D1.K@31.3,55.7 ; v1(45.925,31.975) 45.925,32.205 46.745,33.025 R46.2 ; v1(45.95,24.4) 46.995,25.445 R40.2@48.5,25.445 ; v1(45.975,19.35) 45.975,19.555 46.745,20.325 R36.2 ; v1(45.975,26.975) 45.975,27.175 46.745,27.945 R42.2 ; v1(46,29.425) 46,29.74 46.745,30.485 R44.2 ; v1(46.025,21.925) 46.025,22.145 46.745,22.865 R38.2 ; v1(46.025,37.15) 46.025,37.385 46.745,38.105 R50.2 ; v1(46.025,39.65) 46.025,39.894 46.734,40.603 48.495,40.603 48.5,40.608 R52.2 ; v1(46.075,16.82) 46.075,17.115 46.745,17.785 R34.2 ; v1(46.075,42.1) 46.075,42.515 46.745,43.185 R54.2 ; v1(46.075,52.25) 46.075,52.675 46.745,53.345 R62.2 ; v1(46.1,49.725) 46.1,50.082 46.824,50.805 R60.2 ; v1(46.15,14.075) 47.245,15.17 48.47,15.17 48.475,15.175 R32.2 ; v1(46.15,34.525) 46.15,34.97 46.745,35.565 R48.2 ; v1(46.2,44.725) 46.2,45.044 46.882,45.725 R56.2 ; v1(46.275,47.225) 46.275,47.685 46.855,48.265 R58.2
  Bottom Layer w0.3: C11.1 31.487,33.987 v1(32,34.5) ; C6.1 31.357,38.587 32.214,37.73 32.214,37.334 v1(32.254,37.294) ; v1(35.81,33.103) 35.85,33.063 35.85,32.794 36.757,31.887 C4.1 ; v1(35.81,37.04) 36.733,37.963 37.384,37.963 C7.1
  Bottom Layer w0.483: v1(16.125,40.088) 17.166,40.088 17.192,40.063 ; C15.1 17.192,40.063 ; C16.1 17.192,40.063
  Bottom Layer w0.813: C10.1 C11.1 C14.1 ; C4.1 39.241,31.887 39.253,31.898 C9.1 ; C7.1 C5.1@37.407,39.213
  Bottom Layer w0.991: R4.2 8,15.17 9.173,13.997 v1(10,13.997) ; R6.2@8,17.71 9.173,16.537 10,16.537 ; R8.2@8,20.25 9.173,19.077 10,19.077 ; R10.2@8,22.79 9.173,21.617 10,21.617 ; R12.2@8,25.33 9.173,24.157 10,24.157 ; R14.2@8,27.87 9.173,26.697 10,26.697 ; R16.2@8,30.41 9.173,29.237 10,29.237 ; R18.2@8,32.95 9.173,31.777 10,31.777 ; R20.2@8,35.49 9.173,34.317 10,34.317 ; R22.2@8,38.03 9.173,36.857 10,36.857 ; R24.2@8,40.57 9.173,39.397 10,39.397 ; R26.2@8,43.11 9.173,41.937 10,41.937 ; R28.2@8,45.65 9.173,44.477 10,44.477 ; R30.2@8,48.19 9.173,47.017 10,47.017
  other v1: 33.676,25.531 27.275,31.6 40.225,32.125 28.225,39.35
IN/OUT: C12.2 U2.5 Y1.1 | length 7
  Top Layer w0.3: Y1.1 24.251,35.987 U2.5
  Top Layer w0.737: Y1.1 C12.2
NetD1_A: D1.A R2.2 | length 2.5
  Top Layer w0.838: R2.2@32.65,53.45 32.674,53.474 32.674,55.066 33.158,55.55 D1.A
NetR1_2: R1.2 U2.6 | length 8.1
  Top Layer w0.3: R1.2 23.409,32.06 23.609,32.26 24.82,32.26 28.047,35.487 U2.6
NRST: C14.2 S1.2 U2.7 | length 19.4
  Top Layer w0.3: v1(28.063,34.5) 28.063,34.754 28.296,34.987 U2.7
  Bottom Layer w0.3: S1.2 24.405,30.842 v1(28.063,34.5) 28.749,35.186 29.057,35.186 29.307,35.437 C14.2
OUT/IN: C13.2 R1.1 Y1.3 | length 2.3
  Top Layer w0.737: R1.1 C13.2 Y1.3
PA0: P4.13 R27.2 R28.1 U2.10 | length 41
  Top Layer w0.3: R27.2 6.3,45.65 7.836,44.114 9.432,44.114 9.728,43.819 10.831,43.819 11.733,42.917 11.733,42.817 v1(12.675,41.875) ; U2.10 31.707,33.487 32.019,33.175 v1(32.075,33.175)
  Top Layer w0.762: P4.13 R27.2
  Bottom Layer w0.3: v1(12.675,41.875) 12.642,41.842 12.642,41.446 17.025,37.063 30.552,37.063 32.658,34.957 32.658,33.758 v1(32.075,33.175)
  Bottom Layer w0.762: P4.13 R28.1
PA1: P4.12 R25.2 R26.1 U2.11 | length 39
  Top Layer w0.3: R25.2 6.3,43.11 7.836,41.574 9.181,41.574 9.58,41.175 10.925,41.175 11.45,40.65 11.45,37.55 11.975,37.025 11.975,35.675 13.875,33.775 15.15,33.775 18.225,30.7 28.287,30.7 28.462,30.876 28.462,32.412 29.037,32.987 U2.11
  Top Layer w0.762: P4.12 R25.2
  Bottom Layer w0.762: P4.12 R26.1
PA2: P4.11 R23.2 R24.1 U2.12 | length 37.6
  Top Layer w0.3: R23.2 6.3,40.57 7.836,39.034 9.432,39.034 9.728,38.739 10.811,38.739 10.95,38.6 10.95,37.25 11.425,36.775 11.425,35.45 13.75,33.125 14.85,33.125 17.925,30.05 29.831,30.05 30.007,30.226 U2.12
  Top Layer w0.762: P4.11 R23.2
  Bottom Layer w0.762: P4.11 R24.1
PA3: P4.10 R21.2 R22.1 U2.13 | length 36.2
  Top Layer w0.3: R21.2@6.3,38.03 7.836,36.494 9.432,36.494 9.728,36.199 10.626,36.199 10.85,35.975 10.85,35.175 13.55,32.475 14.525,32.475 17.7,29.3 30.65,29.3 31.307,29.957 U2.13
  Top Layer w0.762: P4.10 6.25,38.08 R21.2@6.3,38.03
  Bottom Layer w0.762: P4.10@3.55,38.08 R22.1
PA4: P4.9 R19.2 R20.1 U2.14 | length 38.3
  Top Layer w0.3: R19.2@6.3,35.49 7.836,33.954 8.907,33.954 9.202,33.659 11.009,33.659 11.075,33.725 11.15,33.725 12.2,32.675 12.2,29.05 12.85,28.4 30.575,28.4 31.807,29.632 U2.14
  Top Layer w0.762: P4.9 6.25,35.54 R19.2@6.3,35.49
  Bottom Layer w0.762: P4.9@3.55,35.54 R20.1@6.3,35.54
PA5: P4.8 R17.2 R18.1 U2.15 | length 37.8
  Top Layer w0.3: R17.2 6.3,32.95 7.836,31.414 9.432,31.414 9.728,31.119 10.581,31.119 11.376,30.324 11.376,28.024 11.8,27.6 30.65,27.6 32.307,29.257 U2.15
  Top Layer w0.762: P4.8 R17.2
  Bottom Layer w0.762: P4.8 R18.1
PA6: P4.7 R15.2 R16.1 U2.16 | length 37.5
  Top Layer w0.3: R15.2 6.3,30.41 7.836,28.874 9.206,28.874 9.605,28.475 10.975,28.475 10.975,27.2 11.35,26.825 30.7,26.825 32.807,28.932 U2.16
  Top Layer w0.762: P4.7 R15.2
  Bottom Layer w0.762: P4.7 R16.1
PA7: P4.6 R13.2 R14.1 U2.17 | length 37.1
  Top Layer w0.3: R13.2 6.3,27.87 7.836,26.334 8.907,26.334 9.16,26.081 9.724,26.081 9.767,26.037 30.762,26.037 33.307,28.582 U2.17
  Top Layer w0.762: P4.6 R13.2
  Bottom Layer w0.762: P4.6 R14.1
PA8: P5.5 R39.2 R40.1 U2.29 | length 25.4
  Top Layer w0.3: U2.29 42.738,34.487 43.05,34.175 43.05,30.75 44.65,29.15 44.65,26.225 47.53,26.225 47.759,26.454 49.296,26.454 50.2,25.55 R40.1
  Top Layer w0.762: R40.1@50.2,25.455 P5.5@53,25.455
  Bottom Layer w0.762: R39.2@50.2,25.405 P5.5
PA9: P5.6 R41.2 R42.1 U2.30 | length 23
  Top Layer w0.3: U2.30 43.088,34.987 43.7,34.375 43.7,30.875 45.05,29.525 45.05,29.319 45.691,28.678 46.422,28.678 46.436,28.692 47.448,28.692 47.655,28.899 49.296,28.899 50.2,27.995 R42.1
  Top Layer w0.762: R42.1@50.2,27.995 P5.6@53,27.995
  Bottom Layer w0.762: R41.2 P5.6
PA10: P5.7 R43.2 R44.1 U2.31 | length 21.8
  Top Layer w0.3: U2.31 43.413,35.487 44.275,34.625 44.275,31.55 44.672,31.153 46.359,31.153 46.438,31.232 47.438,31.232 47.645,31.439 49.296,31.439 50.2,30.535 R44.1
  Top Layer w0.762: R44.1@50.2,30.535 P5.7@53,30.535
  Bottom Layer w0.762: R43.2 P5.7
PA11: P5.8 R45.2 R46.1 U2.32 | length 19.6
  Top Layer w0.3: U2.32 43.613,35.987 44.775,34.825 44.775,34.025 45.022,33.778 47.468,33.778 47.669,33.979 49.296,33.979 50.2,33.075 R46.1
  Top Layer w0.762: R46.1@50.2,33.075 P5.8@53,33.075
  Bottom Layer w0.762: R45.2 P5.8
PA12: P5.9 R47.2 R48.1 U2.33 | length 18.2
  Top Layer w0.3: U2.33 45.213,36.487 45.358,36.342 47.656,36.342 47.833,36.519 49.296,36.519 50.2,35.615 R48.1
  Top Layer w0.762: R48.1@50.2,35.615 P5.9@52.95,35.615
  Bottom Layer w0.762: R47.2@50.25,35.565 P5.9
PA15: P5.10 R49.2 R50.1 U2.38 | length 25.5
  Top Layer w0.3: U2.38 36.307,41.407 37.85,42.95 42.974,42.95 44.975,40.949 44.975,38.9 47.555,38.9 47.715,39.059 49.296,39.059 50.2,38.155 R50.1
  Top Layer w0.762: R50.1@50.2,38.155 P5.10@52.95,38.155
  Bottom Layer w0.762: R49.2@50.25,38.105 P5.10
PB0: P4.5 R11.2 R12.1 U2.18 | length 38.9
  Top Layer w0.3: R11.2 6.3,25.33 7.836,23.794 8.907,23.794 9.202,23.499 11.599,23.499 13.65,25.55 31.3,25.55 33.807,28.057 U2.18
  Top Layer w0.762: P4.5 R11.2
  Bottom Layer w0.762: P4.5 R12.1
PB1: P4.4 R9.2 R10.1 U2.19 | length 41.1
  Top Layer w0.3: R9.2 6.3,22.79 7.836,21.254 8.907,21.254 9.202,20.959 10.272,20.959 10.658,21.344 10.658,21.683 13.875,24.9 31.875,24.9 34.307,27.332 U2.19
  Top Layer w0.762: P4.4 R9.2
  Bottom Layer w0.762: P4.4 R10.1
PB2: P4.3 R7.2 R8.1 U2.20 | length 44.8
  Top Layer w0.3: R7.2 6.3,20.25 7.836,18.714 8.907,18.714 9.046,18.853 9.294,18.853 9.728,18.419 10.272,18.419 10.658,18.804 10.658,20.465 14.543,24.35 33.975,24.35 34.807,25.182 U2.20
  Top Layer w0.762: P4.3 R7.2
  Bottom Layer w0.762: P4.3 R8.1
PB3: P5.11 R51.2 R52.1 U2.39 | length 24.7
  Top Layer w0.3: U2.39 35.807,41.907 37.425,43.525 43.425,43.525 45.597,41.353 47.587,41.353 47.833,41.599 49.296,41.599 50.2,40.695 R52.1
  Top Layer w0.762: R52.1@50.2,40.695 P5.11@53,40.695
  Bottom Layer w0.762: R51.2 P5.11
PB4: P5.12 R53.2 R54.1 U2.40 | length 24.6
  Top Layer w0.3: U2.40 35.307,42.132 37.153,43.978 47.561,43.978 47.723,44.139 49.296,44.139 50.2,43.235 R54.1
  Top Layer w0.762: R54.1@50.2,43.235 P5.12@53,43.235
  Bottom Layer w0.762: R53.2 P5.12
PB5: P5.13 R55.2 R56.1 U2.41 | length 26.4
  Top Layer w0.3: U2.41 34.807,42.632 36.716,44.541 44.505,44.541 46.436,46.472 47.626,46.472 47.833,46.679 49.296,46.679 50.2,45.775 R56.1
  Top Layer w0.762: R56.1@50.2,45.775 P5.13@53,45.775
  Bottom Layer w0.762: R55.2 P5.13
PB6: P5.14 R57.2 R58.1 U2.42 | length 28.9
  Top Layer w0.3: U2.42 34.307,42.982 36.375,45.05 43.663,45.05 45.528,46.915 45.528,48.104 46.436,49.012 47.626,49.012 47.833,49.219 49.296,49.219 50.2,48.315 R58.1
  Top Layer w0.762: R58.1@50.2,48.315 P5.14@53,48.315
  Bottom Layer w0.762: R57.2 P5.14
PB7: P5.15 R59.2 R60.1 U2.43 | length 30.9
  Top Layer w0.3: U2.43 33.807,43.364 36.093,45.65 42.15,45.65 45.353,48.853 45.353,50.469 46.436,51.552 47.626,51.552 47.833,51.759 49.296,51.759 50.2,50.855 R60.1
  Top Layer w0.762: R60.1@50.2,50.855 P5.15@53,50.855
  Bottom Layer w0.762: R59.2 P5.15
PB8: P5.16 R61.2 R62.1 U2.45 | length 35.3
  Top Layer w0.3: v1(32.225,40.95) 32.807,40.368 U2.45 ; v1(32.225,43.5) 33.225,43.5 35.9,46.175 41.875,46.175 44.952,49.252 44.952,53.311 45.94,54.299 49.296,54.299 50.2,53.395 R62.1
  Top Layer w0.762: R62.1@50.2,53.395 P5.16@53,53.395
  Bottom Layer w0.3: v1(32.225,40.95) v1(32.225,43.5)
  Bottom Layer w0.762: R61.2 P5.16
PB9: P4.14 R29.2 R30.1 U2.46 | length 36.2
  Top Layer w0.3: R29.2 6.3,48.19 7.836,46.654 8.907,46.654 9.202,46.359 10.272,46.359 10.289,46.375 10.724,46.375 10.9,46.199 10.9,45.375 13.475,42.8 19.1,42.8 19.725,42.175 23.525,42.175 25.075,40.625 31.502,40.625 32.253,39.874 32.253,39.497 32.307,39.443 U2.46
  Top Layer w0.762: P4.14 R29.2
  Bottom Layer w0.762: P4.14 R30.1
PB10: P4.2 R5.2 R6.1 U2.21 | length 48
  Top Layer w0.3: R5.2 6.3,17.71 7.836,16.174 8.907,16.174 9.202,15.879 10.272,15.879 10.747,16.353 10.747,18.326 11.059,18.638 11.059,19.709 14.757,23.407 35.131,23.407 35.307,23.583 U2.21
  Top Layer w0.762: P4.2 R5.2
  Bottom Layer w0.762: P4.2 R6.1
PB11: P4.1 R3.2 R4.1 U2.22 | length 48.6
  Top Layer w0.3: R3.2 6.3,15.17 8.131,13.339 10.439,13.339 19.116,22.016 35.631,22.016 35.807,22.191 U2.22
  Top Layer w0.762: P4.1 R3.2
  Bottom Layer w0.762: P4.1 R4.1
PB12: P5.1 R31.2 R32.1 U2.25 | length 31.2
  Top Layer w0.3: U2.25 40.45,30.144 40.45,29.15 42.2,27.4 42.2,21.725 43.8,20.125 43.8,17.976 43.976,17.8 44.574,17.8 44.75,17.624 44.75,16.074 44.856,15.967 47.601,15.967 47.833,16.199 49.296,16.199 50.2,15.295 50.2,15.245 R32.1@50.2,15.195
  Top Layer w0.762: R32.1@50.2,15.295 P5.1@53,15.295
  Bottom Layer w0.762: R31.2@50.2,15.245 P5.1
PB13: P5.2 R33.2 R34.1 U2.26 | length 30.4
  Top Layer w0.3: U2.26 41.049,32.987 41.225,32.811 41.225,29.3 42.75,27.775 42.75,22.175 44.375,20.55 44.375,19.075 44.908,18.542 47.636,18.542 47.833,18.739 49.296,18.739 50.2,17.835 R34.1
  Top Layer w0.762: R34.1@50.2,17.835 P5.2@53,17.835
  Bottom Layer w0.762: R33.2 P5.2
PB14: P5.3 R35.2 R36.1 U2.27 | length 28.6
  Top Layer w0.3: U2.27 41.799,33.487 41.975,33.311 41.975,29.775 43.4,28.35 43.4,22.7 44.922,21.178 47.522,21.178 47.623,21.279 49.296,21.279 50.2,20.375 R36.1
  Top Layer w0.762: R36.1@50.2,20.375 P5.3@53,20.375
  Bottom Layer w0.762: R35.2 P5.3
PB15: P5.4 R37.2 R38.1 U2.28 | length 27.1
  Top Layer w0.3: U2.28 42.349,33.987 42.525,33.811 42.525,30.375 44.075,28.825 44.075,24.4 44.858,23.617 47.631,23.617 47.833,23.819 49.296,23.819 50.2,22.915 R38.1
  Top Layer w0.762: R38.1@50.2,22.915 P5.4@53,22.915
  Bottom Layer w0.762: R37.2 P5.4
SWCLK: P2.3 U2.37 | length 6.5
  Top Layer w0.3: U2.37 36.807,40.037 37.275,40.505 42.255,40.505 P2.3
SWDIO: P2.2 U2.34 | length 6.3
  Top Layer w0.3: U2.34 40.762,36.987 41.025,37.25 41.025,39.129 41.201,39.305 P2.2
pads on no net: U2.1 U2.2
copper on no net:
  other v1: 10,16.537 10,19.077 10,21.617 10,24.157 10,26.697 10,29.237 10,31.777 10,34.317 10,36.857 10,39.397 10,41.937 10,44.477 10,47.017

## Polygon pours and split planes (outlines as drawn)
GND on Bottom Layer "GND_L04_P003" (solid, remove dead copper, pour order 3): 1,12 1,60 55.075,60 55.075,12
GND on Top Layer "GND_L01_P004" (solid, remove dead copper, pour order 4): 1,12 1,60 55.075,60 55.075,12
+3V3 on Power 3v3 (split plane): 54.565,12.51 1.51,12.51 1.51,59.49 54.565,59.49
GND on Ground (split plane): 54.565,12.51 1.51,12.51 1.51,59.49 54.565,59.49

## Keep-outs
Keep-Out Layer:
  the board outline again, w0.254

## Silkscreen, mask and mechanical layers (free items; w line width, h text height)
Top Overlay:
  text "GND" at 6.726,57.684 h0.76
  text "PB8" at 45.074,53.153 h0.76
  text "+9V" at 6.726,50.983 h0.76
  text "PB7" at 45.074,50.602 h0.76
  text "PB6" at 45.074,48.072 h0.76
  text "PB9" at 10.779,47.843 h0.76
  text "+3V3" at 29.891,47.804 h0.76 r90
  text "BOOT0" at 31.161,47.804 h0.76 r90
  text "GND" at 32.431,47.804 h0.76 r90
  text "PB5" at 45.074,45.532 h0.76
  text "PA0" at 10.779,45.304 h0.76
  text "PB4" at 45.074,42.983 h0.76
  text "PA1" at 10.793,42.776 h0.76
  text "GND" at 43.599,41.645 h0.25
  text "PB3" at 45.074,40.452 h0.76
  text "SWCLK" at 43.654,40.432 h0.25
  text "PA2" at 10.779,40.22 h0.76
  text "SWDIO" at 43.599,39.105 h0.25
  text "PA15" at 45.074,37.912 h0.76
  text "+3V3" at 43.599,37.835 h0.25
  text "PA3" at 10.779,37.684 h0.76
  text "PA12" at 45.074,35.362 h0.76
  text "PA4" at 10.779,35.135 h0.76
  text "PA11" at 45.074,32.822 h0.76
  text "PA5" at 10.779,32.604 h0.76
  text "PA10" at 45.074,30.292 h0.76
  text "PA6" at 10.779,30.064 h0.76
  text "PA9" at 45.074,27.751 h0.76
  text "PA7" at 10.829,27.454 h0.76
  text "PA8" at 45.074,25.213 h0.76
  text "PB0" at 10.779,24.984 h0.76
  text "PB15" at 45.074,22.672 h0.76
  text "PB1" at 10.779,22.434 h0.76
  text "PB14" at 45.074,20.123 h0.76
  text "PB2" at 10.779,19.894 h0.76
  text "PB13" at 45.074,17.592 h0.76
  text "PB10" at 10.779,17.364 h0.76
  text "PB12" at 45.074,15.042 h0.76
  text "PB11" at 10.779,14.814 h0.76

## Dimensions
0,7.315 to 0,60.071 on Mechanical 13
1,12 to 55.075,12 on Mechanical 13